# Altium PCB PCB.PcbDoc (part 1 of 2)
Units mm, origin at the board's own origin, x right, y up, seen from the top; angles counter-clockwise.
Board outline 130 x 130 mm, 2 copper layers (Top Layer, Bottom Layer), stack 1.571 mm thick; 113 components, 99 nets, 422 pads, 245 vias.
Unrouted connection lines stored in the file: 122.
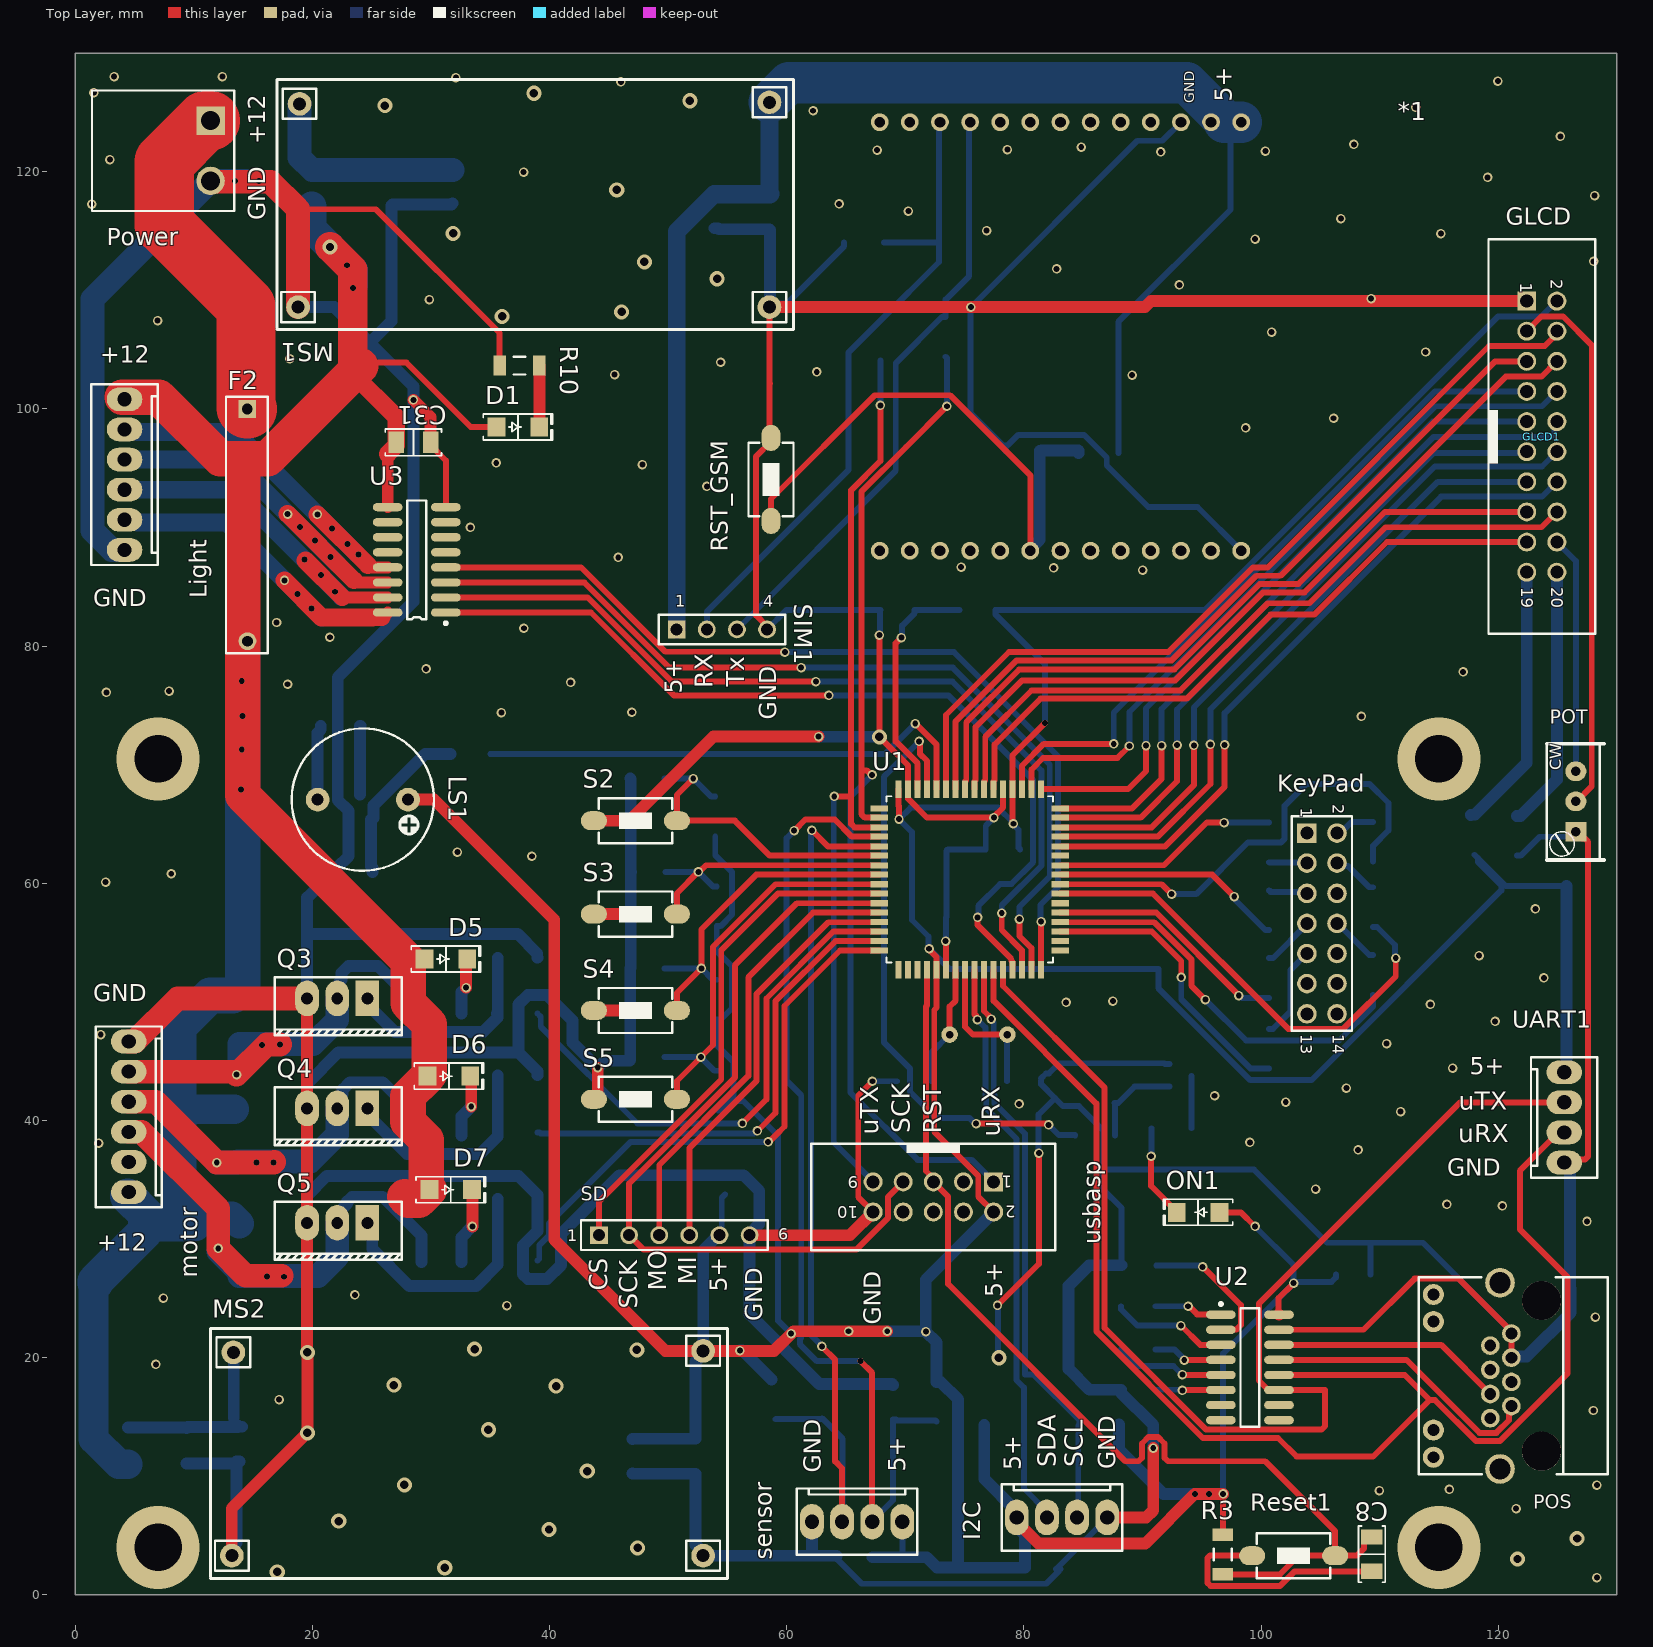
[diagram p0: Top Layer view]
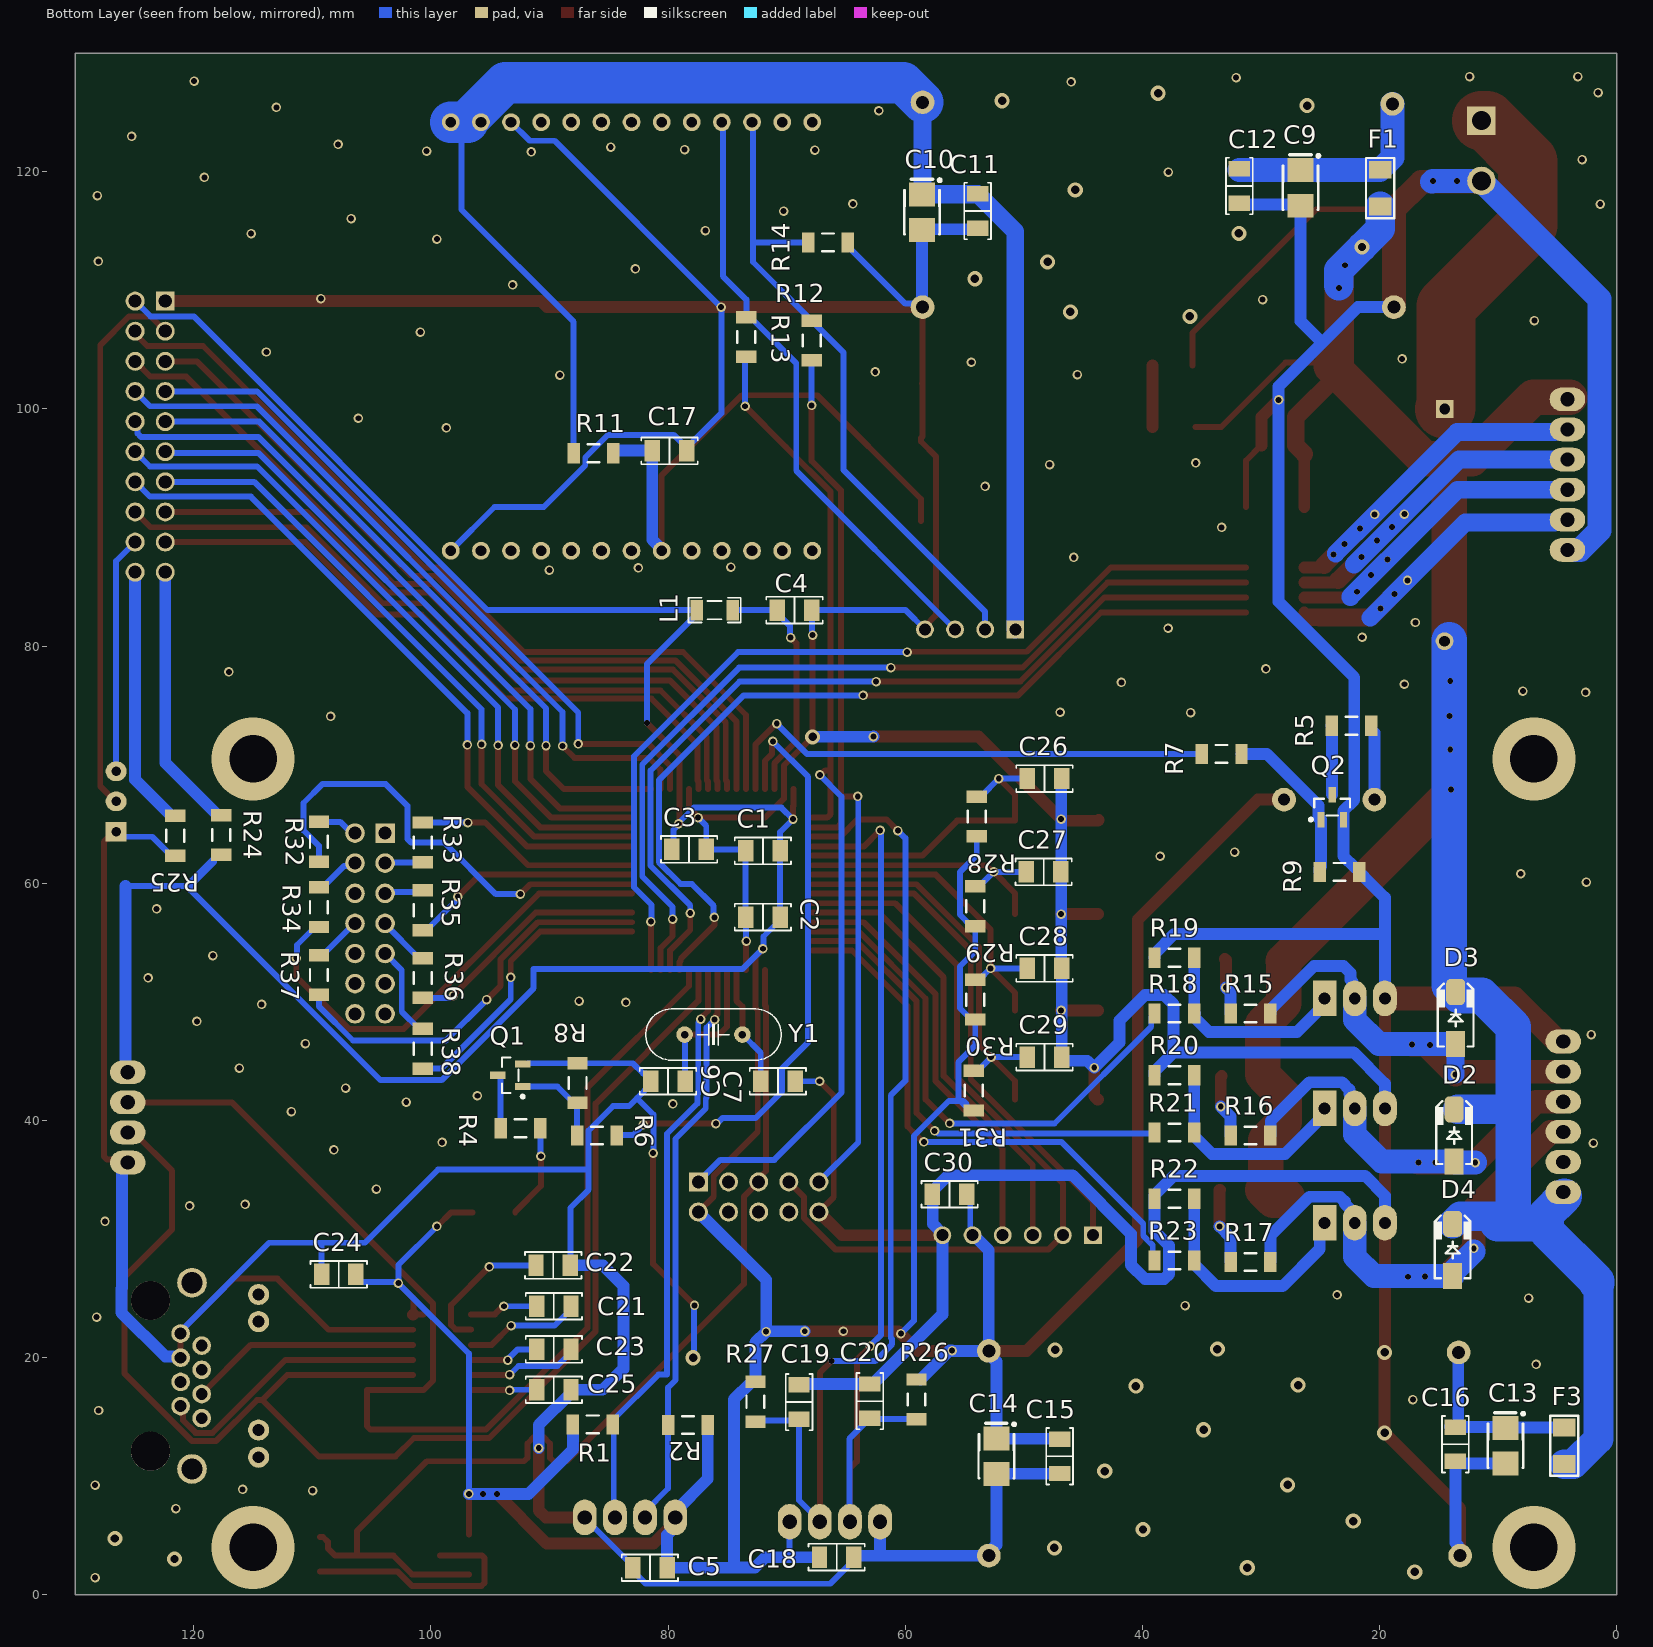
[diagram p1: Bottom Layer view, seen from below]

## Layer stack, top to bottom
Top Solder: solder mask 0.0102, Solder Resist, Dk 3.5
Top Layer: signal copper 0.0356
Dielectric 1: dielectric 1.5, FR-4, Dk 4.8
Bottom Layer: signal copper 0.0356
Bottom Solder: solder mask 0.0102, Solder Resist, Dk 3.5

## Board outline
0,0 130,0 130,130 0,130

## Design rules (kind name [scope] priority, off if disabled: settings)
AcuteAngle [All] p1: minimum=6.00000000000000E+0001 checktracksonly=TRUE
AssemblyTestPointUsage [All] p1 off:
AssemblyTestpoint [All] p1 off: testpointundercomponent=TRUE minsize=1.016 maxsize=2.54 preferedsize=1.524 minholesize=0 maxholesize=1.016 preferedholesize=0.813 testpointgrid=0.025 usegrid=TRUE gridtolerance=0 allowsidetop=TRUE allowsidebottom=TRUE
BoardOutlineClearance [All] p1: gap=0.2 ignorepadtopadclearanceinfootprint=FALSE
Clearance Poly_Clearance [All vs InPolygon] p1: gap=0.25 ignorepadtopadclearanceinfootprint=TRUE except(0.3: Arc-Hole Track-Hole SMDPad-Hole THPad-Hole Via-Hole Fill-Hole Poly-Hole Region-Hole Text-Hole)
Clearance [All] p2: gap=0.2 ignorepadtopadclearanceinfootprint=FALSE except(0.3: Arc-Hole Track-Hole SMDPad-Hole THPad-Hole Via-Hole Fill-Hole Poly-Hole Region-Hole Text-Hole)
FabricationTestPointUsage [All] p1 off: valid=0 allowmultiple=FALSE
FabricationTestpoint [All] p1 off: side=3 testpointundercomponent=TRUE minsize=1.016 maxsize=2.54 preferedsize=1.524 minholesize=0 maxholesize=1.016 preferedholesize=0.813 testpointgrid=0.025 allowsidetop=TRUE allowsidebottom=TRUE usegrid=TRUE gridtolerance=0
HoleSize [All] p1: absolutevalues=TRUE maxlimit=10 minlimit=0.4 maxpercent=80.000 minpercent=20.000
HoleToHoleClearance [All] p1: gap=0.3 allowstackedmicrovias=TRUE
MinimumAnnularRing [All] p1: minimumring=0.15
MinimumSolderMaskSliver [All] p1: minsoldermaskwidth=0.01
PolygonConnect [All] p1: thpad.connectstyle=Relief thpad.reliefconductorwidth=0.4 thpad.reliefentries=4 thpad.polygonreliefangle="90 Angle" thpad.airgapwidth=0.4 smdpad.connectstyle=Relief smdpad.reliefconductorwidth=0.4 smdpad.reliefentries=4 smdpad.polygonreliefangle="90 Angle" smdpad.airgapwidth=0.4 via.connectstyle=Direct via.reliefconductorwidth=0.254 via.reliefentries=4 via.polygonreliefangle="90 Angle" via.airgapwidth=0.254
RoutingVias [All] p1: holewidth=0.4 width=0.7 viastyle="Through Hole" minholewidth=0.4 minwidth=0.7 maxholewidth=3 maxwidth=6
SilkToSilkClearance [All] p1: silktosilkclearance=0
SilkToSolderMaskClearance [IsPad] p1: minsilkscreentomaskgap=0.01 clearancetoexposedcopper=TRUE
SolderMaskExpansion [All] p1: expansion=0.102 istentingtop=FALSE
Width [All] p1: maxlimit=10 minlimit=0.2 preferedwidth=0.3
21 further rules are at their usual default settings.

## Classes and differential pairs
component class U_SDcard: " " C30
component class U_POS: C21 C22 C23 C24 C25 POS U2
component class U_Lighting: C31 Light U3
component class U_GSM: *1 C17 R11 R12 R13 R14 RST_GSM SIM1
component class U_Sensor: C18 C19 C20 R26 R27 sensor
component class U_KeyPad: KeyPad R32 R33 R34 R35 R36 R37 R38
component class U_Motor: D2 D3 D4 D5 D6 D7 motor Q3 Q4 Q5 R15 R16 R17 R18 R19 R20 R21 R22 R23
component class U_Switch: C26 C27 C28 C29 R28 R29 R30 R31 S2 S3 S4 S5
component class U_GLCD: GLCD1 POT R24 R25
component class U_Controller: C1 C2 C3 C4 C5 C6 C7 C8 I2C L1 LS1 ON1 Q1 Q2 R1 R2 R3 R4 R5 R6 R7 R8 R9 Reset1 U1 UART1 usbasp Y1

## Components (designator, comment, footprint, x,y, rotation, side; value= is the part's Value field where it differs from the comment)
*1 "EC200miniDB" PCBComponent_1 98.323,124.181 r180 top
C1 "" "CAP 1206/3216" 72.009,62.738 r0 bottom
C2 "" "CAP 1206/3216" 72.009,57.15 r0 bottom
C3 "100n" "CAP 1206/3216" 78.232,62.865 r180 bottom
C4 "100n" "CAP 1206/3216" 69.342,83.033 r180 bottom
C5 "100n" "CAP 1206/3216" 81.534,2.286 r0 bottom
C6 "22p" "CAP 1206/3216" 80.01,43.307 r0 bottom
C7 "22p" "CAP 1206/3216" 70.739,43.307 r180 bottom
C8 "100n" "CAP 1206/3216" 109.347,3.429 r270 top
C9 "10u" SMT_C_Tantalum_B 26.67,118.642 r270 bottom
C10 "10u" SMT_C_Tantalum_B 58.598,116.586 r270 bottom
C11 "100n" "CAP 1206/3216" 53.899,116.688 r270 bottom
C12 "100n" "CAP 1206/3216" 31.826,118.796 r270 bottom
C13 "10u" SMT_C_Tantalum_B 9.398,12.573 r270 bottom
C14 "10u" SMT_C_Tantalum_B 52.324,11.684 r270 bottom
C15 "100n" "CAP 1206/3216" 46.99,11.684 r270 bottom
C16 "100n" "CAP 1206/3216" 13.614,12.7 r270 bottom
C17 "100n" "CAP 1206/3216" 79.883,96.469 r180 bottom
C18 "100n" "CAP 1206/3216" 65.786,3.175 r180 bottom
C19 "2n" "CAP 1206/3216" 68.961,16.256 r90 bottom
C20 "2n" "CAP 1206/3216" 62.992,16.33 r90 bottom
C21 "1u'F, 50'V" "CAP 1206/3216" 89.637,24.333 r180 bottom
C22 "1u'F, 50'V" "CAP 1206/3216" 89.687,27.788 r180 bottom
C23 "1u'F, 50'V" "CAP 1206/3216" 89.637,20.701 r180 bottom
C24 "1u'F, 50'V" "CAP 1206/3216" 107.772,27.026 r0 bottom
C25 "1u'F, 50'V" "CAP 1206/3216" 89.637,17.297 r180 bottom
C26 "100n" "CAP 1206/3216" 48.26,68.834 r180 bottom
C27 "100n" "CAP 1206/3216" 48.334,60.96 r180 bottom
C28 "100n" "CAP 1206/3216" 48.26,52.832 r180 bottom
C29 "100n" "CAP 1206/3216" 48.26,45.339 r180 bottom
C30 "1u'F, 50'V" "CAP 1206/3216" 56.261,33.782 r180 bottom
C31 "1u'F, 50'V" "CAP 1206/3216" 28.524,97.18 r180 top
D1 "Yellow, 1206" "LED 1206/3216 YELLOW" 37.338,98.476 r0 top
D2 "1N5819" 430X270D 13.716,38.735 r90 bottom
D3 "1N5819" 430X270D 13.589,48.641 r90 bottom
D4 "1N5819" 430X270D 13.843,29.083 r90 bottom
D5 "Yellow, 1206" "LED 1206/3216 YELLOW" 31.267,53.619 r0 top
D6 "Yellow, 1206" "LED 1206/3216 YELLOW" 31.521,43.739 r0 top
D7 "Yellow, 1206" "LED 1206/3216 YELLOW" 31.674,34.163 r0 top
F1 "2A" 1206_F 19.964,118.618 r90 bottom
F2 "180'C, 10'A" PIN-W2/E2.8 14.529,89.611 r270 top
F3 "2A" 1206_F 4.445,12.573 r90 bottom
GLCD1 "10x2" BOX-HDR-10X2-2.54mm-S 123.673,97.663 r270 top
I2C "4'Pin" "MOLEX KK 0022272041" 83.21,6.528 r180 top
KeyPad "7x2" HDR_THT_7x2M_2.54mm 105.131,56.617 r270 top (schematic designator KeyPad1)
L1 "100nH" IND1206 76.073,83.033 r180 bottom
Light "6'Pin" "MOLEX KK 0022272061" 4.166,94.463 r90 top (schematic designator Light1)
LS1 "5V" BZ_SJ 24.257,67.056 r180 top
motor "6'Pin" "MOLEX KK 0022272061" 4.521,40.31 r90 top
MS1 "LM2596" LM2596_modsen 38.481,116.84 r0 top
MS2 "LM2596" LM2596_modsen 32.893,11.557 r0 top
ON1 "Value?" "LED 1206/3216 GREEN" 94.691,32.258 r180 top
POS "RJ45, mini" RJ45_MINI 123.647,18.466 r90 top (schematic designator J1)
POT "10K" "Multi turn 01" 126.543,64.364 r180 top (schematic designator P1)
Power "2'Pin" Phoenix_2PIN_RA_P5.08mm 7.417,121.768 r270 top (schematic designator Power1)
Q1 "NPN" SOT23_N 93.311,43.815 r0 bottom
Q2 "NPN" SOT23_N 24.003,66.421 r90 bottom
Q3 "NPN" "TO-220 AB" 22.098,50.292 r180 top
Q4 "NPN" "TO-220 AB" 22.098,41.021 r180 top
Q5 "NPN" "TO-220 AB" 22.098,31.369 r180 top
R1 "Value?" "RES 1206 (3216X08L)" 85.061,14.376 r0 bottom value=4.7K
R2 "Value?" "RES 1206 (3216X08L)" 79.629,14.326 r180 bottom value=4.7K
R3 "4.7K" "RES 1206 (3216X08L)" 96.774,2.107 r90 top value=10K
R4 "47K" "RES 1206 (3216X08L)" 93.751,39.345 r180 bottom value=Value?
R5 "Value?" "RES 1206 (3216X08L)" 21.082,73.279 r0 bottom
R6 "Value?" "RES 1206 (3216X08L)" 87.301,38.735 r180 bottom value=4.7K
R7 "4.7K" "RES 1206 (3216X08L)" 32.029,70.917 r0 bottom
R8 "4.7K" "RES 1206 (3216X08L)" 87.63,44.45 r270 bottom value=47K
R9 "47K" "RES 1206 (3216X08L)" 22.098,60.96 r0 bottom
R10 "1.8K" "RES 1206 (3216X08L)" 36.17,103.657 r0 top
R11 "10K" "RES 1206 (3216X08L)" 84.987,96.266 r0 bottom
R12 "47K" "RES 1206 (3216X08L)" 67.894,104.469 r90 bottom
R13 "1K" "RES 1206 (3216X08L)" 73.406,104.775 r90 bottom value=1.2K
R14 "5.6K" "RES 1206 (3216X08L)" 65.226,114.046 r0 bottom
R15 "1.8K" "RES 1206 (3216X08L)" 29.591,49.022 r0 bottom
R16 "1.8K" "RES 1206 (3216X08L)" 29.591,38.735 r0 bottom
R17 "1.8K" "RES 1206 (3216X08L)" 29.591,28.067 r0 bottom
R18 "4.7K" "RES 1206 (3216X08L)" 36.012,49.022 r0 bottom
R19 "47K" "RES 1206 (3216X08L)" 38.608,53.721 r180 bottom
R20 "47K" "RES 1206 (3216X08L)" 38.608,43.815 r180 bottom
R21 "4.7K" "RES 1206 (3216X08L)" 36.012,38.989 r0 bottom
R22 "47K" "RES 1206 (3216X08L)" 38.608,33.401 r180 bottom
R23 "4.7K" "RES 1206 (3216X08L)" 36.012,28.194 r0 bottom
R24 "0" "RES 1206 (3216X08L)" 117.678,65.38 r270 bottom
R25 "0" "RES 1206 (3216X08L)" 121.564,65.303 r270 bottom
R26 "10K" "RES 1206 (3216X08L)" 59.055,17.78 r270 bottom
R27 "10K" "RES 1206 (3216X08L)" 72.644,14.986 r90 bottom
R28 "10K" "RES 1206 (3216X08L)" 53.975,66.929 r270 bottom
R29 "10K" "RES 1206 (3216X08L)" 54.102,59.361 r270 bottom
R30 "10K" "RES 1206 (3216X08L)" 54.102,51.487 r270 bottom
R31 "10K" "RES 1206 (3216X08L)" 54.229,43.815 r270 bottom
R32 "100" "RES 1206 (3216X08L)" 109.449,62.205 r90 bottom
R33 "100" "RES 1206 (3216X08L)" 100.686,62.153 r90 bottom
R34 "Value" "RES 1206 (3216X08L)" 109.449,56.692 r90 bottom
R35 "Value" "RES 1206 (3216X08L)" 100.686,59.03 r270 bottom
R36 "Value" "RES 1206 (3216X08L)" 100.686,53.315 r270 bottom
R37 "Value" "RES 1206 (3216X08L)" 109.449,50.977 r90 bottom
R38 "Value" "RES 1206 (3216X08L)" 100.686,47.346 r270 bottom
Reset1 "PB" SW_PB_SMD_2PIN_SPST_6X3X2 102.743,3.302 r0 top
RST_GSM "PB" SW_PB_SMD_2PIN_SPST_6X3X2 58.674,94.056 r90 top (schematic designator S1)
S2 "PB" SW_PB_SMD_2PIN_SPST_6X3X2 47.244,65.278 r0 top
S3 "PB" SW_PB_SMD_2PIN_SPST_6X3X2 47.244,57.404 r0 top
S4 "PB" SW_PB_SMD_2PIN_SPST_6X3X2 47.244,49.276 r0 top
S5 "PB" SW_PB_SMD_2PIN_SPST_6X3X2 47.244,41.783 r0 top
SD "6" HDR_THT_6F_2.54mm 50.521,30.328 r0 top (schematic designator SD1)
sensor "4'Pin" "MOLEX KK 0022272041" 65.938,6.172 r180 top
SIM1 "4" HDR_THT_4F_2.54mm 54.534,81.407 r0 top
U1 "ATMEGA64A-AU" QFP80P1600X1600X120-64N 75.438,60.325 r0 top
U2 "MAX3232" NSO16_M 99.06,19.177 r0 top
U3 "ULN2003" SO16_M 28.804,87.274 r180 top
UART1 "UART" "MOLEX KK 0022272041" 125.56,40.259 r270 top
usbasp "5x2" BOX-HDR-5X2-2.54mm-S 72.365,33.553 r180 top (schematic designator usbasp1)
Y1 "8M" "XTAL Small" 76.173,47.244 r0 bottom

## Footprints (in the part's own frame and the unit in brackets; to place one, negate y for a bottom-side part, rotate by r counter-clockwise, add the part's x,y. Pads: shape width x height; smd on the part's side, far side on the other; paste and mask are expansions set on the pad)
430X270D [mm] "SMA Molded Diode, 2-Leads, Body 4.3x2.7mm"
  rect 2.2x1.6 smd: 1(-2.2,0)
  rrect50% 2.2x1.6 smd: 2(2.2,0)
  silkscreen extent -2.4,-1.5 2.9,1.5, body extent -2.75,-1.4 2.75,1.4, height 2.6
1206_F [mm] "Surface mount FUSE 1206"
  rect 1.5x1.9 smd: 1(-1.55,0) 2(1.55,0)
  silkscreen extent -2.54,-1.18 2.54,1.18, body extent -1.6,-0.83 1.6,0.83, height 0.56
BOX-HDR-5X2-2.54mm-S [mm] "10 pins, straight, gold plating"
  rect 1.6x1.6 hole 1.1: 1(-5.08,-1.27)
  round 1.6 hole 1.1: 2(-5.08,1.27) 3(-2.54,-1.27) 4(-2.54,1.27) 5(0,-1.27) 6(0,1.27) 7(2.54,-1.27) 8(2.54,1.27) 9(5.08,-1.27) 10(5.08,1.27)
  silkscreen extent -10.28,-4.5 10.28,4.5, body extent -10.18,-4.42 10.18,4.75, height 9.13
BOX-HDR-10X2-2.54mm-S [mm] "20 pins, straight, gold plating"
  rect 1.6x1.6 hole 1.1: 1(-11.43,-1.27)
  round 1.6 hole 1.1: 2(-11.43,1.27) 3(-8.89,-1.27) 4(-8.89,1.27) 5(-6.35,-1.27) 6(-6.35,1.27) 7(-3.81,-1.27) 8(-3.81,1.27) 9(-1.27,-1.27) 10(-1.27,1.27) 11(1.27,-1.27) 12(1.27,1.27) 13(3.81,-1.27) 14(3.81,1.27) 15(6.35,-1.27) 16(6.35,1.27) 17(8.89,-1.27) 18(8.89,1.27) 19(11.43,-1.27) 20(11.43,1.27)
  silkscreen extent -16.63,-4.5 16.63,4.5, body extent -16.53,-4.42 16.53,4.75, height 9.13
BZ_SJ [mm] "Buzzer From Old SJ Library"
  round 2 hole 1: 1(-3.81,0) 2(3.81,0)
  silkscreen extent -6,-6 6,6, body extent -5.82,-6 6.17,5.99, height 9.5
"CAP 1206/3216" [mm] "Chip Capacitor, 2-Leads, Body 3.25x1.60mm, IPC Medium Density"
  rect 1.3x1.8 smd: 1(-1.45,0) 2(1.45,0)
  silkscreen extent -2.37,-1.12 2.37,1.12, body extent -1.6,-0.81 1.6,0.81, height 1.62
HDR_THT_4F_2.54mm [mm] "Socket Header, Pitch 2.54 mm, THT, Vertical, single row, 4p"
  rect 1.5x1.5 hole 1.02: 1(-3.81,0)
  round 1.5 hole 1.02: 2(-1.27,0) 3(1.27,0) 4(3.81,0)
  silkscreen extent -5.33,-1.25 5.33,1.25, body extent -5.33,-1.25 5.33,1.25, height 8.55
HDR_THT_6F_2.54mm [mm] "Socket Header, Pitch 2.54 mm, THT, Vertical, single row, 6p"
  rect 1.5x1.5 hole 1.02: 1(-6.35,0)
  round 1.5 hole 1.02: 2(-3.81,0) 3(-1.27,0) 4(1.27,0) 5(3.81,0) 6(6.35,0)
  silkscreen extent -7.87,-1.25 7.87,1.25, body extent -7.87,-1.25 7.87,1.25, height 8.55
HDR_THT_7x2M_2.54mm [mm] "Pin Header, pitch 2.54 mm, THT, Vertical, dual row, 14p"
  rect 1.65x1.65 hole 1.1: 1(-7.62,-1.27)
  round 1.65 hole 1.1: 2(-7.62,1.27) 3(-5.08,-1.27) 4(-5.08,1.27) 5(-2.54,-1.27) 6(-2.54,1.27) 7(0,-1.27) 8(0,1.27) 9(2.54,-1.27) 10(2.54,1.27) 11(5.08,-1.27) 12(5.08,1.27) 13(7.62,-1.27) 14(7.62,1.27)
  silkscreen extent -9.04,-2.54 9.04,2.54, body extent -8.89,-2.54 8.89,2.54, height 8.59
IND1206 [mm] "Chip Inductor, 2-Leads, Body 3/20x1/60mm, IPC Medium Density DESIGNER:ABBAS BASEREH"
  rect 1.04x1.74 smd: 1(-1.51,0) 2(1.51,0)
  silkscreen extent -2.2,-1.05 2.2,1.05, body extent -1.65,-0.85 1.65,0.85, height 0.94
"LED 1206/3216 GREEN" [mm] "Chip Diode, 2-Leads, Body 3.13x1.55mm, IPC Medium Density"
  rect 1.5x1.6 smd: 1(-1.8,0) 2(1.8,0)
  silkscreen extent -2.92,-1.1 2.92,1.1, body extent -1.6,-0.8 1.6,0.8, height 0.9
"LED 1206/3216 YELLOW" [mm] "Chip Diode, 2-Leads, Body 3.13x1.55mm, IPC Medium Density"
  rect 1.5x1.6 smd: 1(-1.8,0) 2(1.8,0)
  silkscreen extent -2.92,-1.1 2.92,1.1, body extent -1.6,-0.8 1.6,0.8, height 0.9
LM2596_modsen [mm]
  round 2 hole 1.1: 1(-19.558,8.89) 2(-19.685,-8.255) 3(20.066,-8.255) 4(20.066,9.017)
  silkscreen extent -21.46,-10.16 22.1,10.92, body extent -21.5,-10.12 22,10.88, height 16.91
"MOLEX KK 0022272041" [mm]
  oval 2x3 hole 1.2: 1(-3.81,0) 2(-1.27,0) 3(1.27,0) 4(3.81,0)
  silkscreen extent -5.08,-2.79 5.08,2.79, body extent -5.08,-2.9 5.08,2.9, height 11.7
"MOLEX KK 0022272061" [mm]
  oval 2x3 hole 1.2: 1(-6.35,0) 2(-3.81,0) 3(-1.27,0) 4(1.27,0) 5(3.81,0) 6(6.35,0)
  silkscreen extent -7.62,-2.79 7.62,2.79, body extent -7.62,-2.9 7.62,2.9, height 11.7
"Multi turn 01" [mil] "Stand Multi Turn - Turning CW Increase P1~2 Resistor"
  rect 70x65 hole 31.5: 1(0,0)
  oval 70x65 hole 31.5: 2(0,-100) 3(0,-200)
  silkscreen extent -94,-291 96,94, body extent -74,-282 92,92, height 452
NSO16_M [mm]
  oval 2.5x0.7 smd: 1(-2.45,4.445) 2(-2.45,3.175) 3(-2.45,1.905) 4(-2.45,0.635) 5(-2.45,-0.635) 6(-2.45,-1.905) 7(-2.45,-3.175) 8(-2.45,-4.445) 9(2.45,-4.445) 10(2.45,-3.175) 11(2.45,-1.905) 12(2.45,-0.635) 13(2.45,0.635) 14(2.45,1.905) 15(2.45,3.175) 16(2.45,4.445)
  silkscreen extent -2.57,-5 0.8,5.47, body extent -3.1,-5.08 3.1,5.08, height 1.73
PCBComponent_1 [mm]
  round 1.5 hole 0.9: 1(0,0) 2(2.54,0) 3(5.08,0) 4(7.62,0) 5(10.16,0) 6(12.7,0) 7(15.24,0) 8(17.78,0) 9(20.32,0) 10(22.86,0) 11(25.4,0) 12(27.94,0) 13(30.48,0) 14(30.48,36.14) 15(27.94,36.14) 16(25.4,36.14) 17(22.86,36.14) 18(20.32,36.14) 19(17.78,36.14) 20(15.24,36.14) 21(12.7,36.14) 22(10.16,36.14) 23(7.62,36.14) 24(5.08,36.14) 25(2.54,36.14) 26(0,36.14)
  body extent -11.45,-2.06 32.75,38.2, height 2.36
Phoenix_2PIN_RA_P5.08mm [mm] "Phoenix 2 Pin; Pitch 5.08mm; Body 1016X1200"
  rect 2.4x2.4 hole 1.6: 1(-2.54,4)
  round 2.4 hole 1.6: 2(2.54,4)
  silkscreen extent -5.08,-6 5.08,6, body extent -5.08,-6 5.08,6, height 8.55
PIN-W2/E2.8 [mm] "Thru-Hole; 2 Leads"
  rect 1.5x1.5 hole 0.9: 1(-10.389,-0.025)
  round 1.5 hole 0.9: 2(9.195,0)
  silkscreen extent -11.4,-1.8 10.21,1.73, body extent -11.24,-1.7 10.08,1.6, height 2.57
QFP80P1600X1600X120-64N [mil]
  rect 58x20 smd: 1(-300,236) 2(-300,205) 3(-300,173) 4(-300,142) 5(-300,110) 6(-300,79) 7(-300,47) 8(-300,16) 9(-300,-16) 10(-300,-47) 11(-300,-79) 12(-300,-110) 13(-300,-142) 14(-300,-173) 15(-300,-205) 16(-300,-236) 33(300,-236) 34(300,-205) 35(300,-173) 36(300,-142) 37(300,-110) 38(300,-79) 39(300,-47) 40(300,-16) 41(300,16) 42(300,47) 43(300,79) 44(300,110) 45(300,142) 46(300,173) 47(300,205) 48(300,236)
  rect 20x58 smd: 17(-236,-300) 18(-205,-300) 19(-173,-300) 20(-142,-300) 21(-110,-300) 22(-79,-300) 23(-47,-300) 24(-16,-300) 25(16,-300) 26(47,-300) 27(79,-300) 28(110,-300) 29(142,-300) 30(173,-300) 31(205,-300) 32(236,-300) 49(236,300) 50(205,300) 51(173,300) 52(142,300) 53(110,300) 54(79,300) 55(47,300) 56(16,300) 57(-16,300) 58(-47,300) 59(-79,300) 60(-110,300) 61(-142,300) 62(-173,300) 63(-205,300) 64(-236,300)
  silkscreen extent -276,-276 276,276, body extent -315,-315 315,315, height 47
"RES 1206 (3216X08L)" [mm]
  rect 1.05x1.7 smd: 1(-0.377,0) 2(2.973,0)
  silkscreen extent 0.8,-0.75 1.8,0.75, body extent -0.23,-0.76 2.82,0.76, height 0.6
RJ45_MINI [mm] "RJ45 MiniWith LED"
  round 1.575 hole 1: 1(3.57,2.54) 2(2.55,4.32) 3(1.53,2.54) 4(0.51,4.32) 5(-0.51,2.54) 6(-1.53,4.32) 7(-2.55,2.54) 8(-3.57,4.32)
  round 2.5 hole 1.8: 9(-7.85,3.5) 10(7.85,3.5)
  round 3.3 hole 3.3 unplated: 11(-6.35,0) 12(6.35,0)
  round 1.778 hole 1: 13(6.86,9.12) 14(4.57,9.12) 15(-4.57,9.12) 16(-6.86,9.12)
  silkscreen extent -8.3,-5.59 8.3,10.34, body extent -8.35,-5.99 8.36,10.26, height 14.75
SMT_C_Tantalum_B [mm] "Capacitor, SM Tantalum; Body 3.5 x 2.8 mm (LxW typ)"
  rect 2x2.2 smd: 1(-1.5,0) 2(1.5,0)
  silkscreen extent -2.82,-1.5 1.85,1.62, body extent -1.75,-1.4 1.75,1.4, height 1.9
SO16_M [mm]
  oval 2.5x0.7 smd: 1(-2.45,4.445) 2(-2.45,3.175) 3(-2.45,1.905) 4(-2.45,0.635) 5(-2.45,-0.635) 6(-2.45,-1.905) 7(-2.45,-3.175) 8(-2.45,-4.445) 9(2.45,-4.445) 10(2.45,-3.175) 11(2.45,-1.905) 12(2.45,-0.635) 13(2.45,0.635) 14(2.45,1.905) 15(2.45,3.175) 16(2.45,4.445)
  silkscreen extent -2.58,-5 0.8,5.47, body extent -3,-4.97 3,4.96, height 1.62
SOT23_N [mm] "SOT23, 3-Leads, Body 2.9x1.3mm, Pitch 0.95mm, Lead Span 2.3mm, IPC Medium Density"
  rect 1.3x0.6 smd: 1(-1.05,0.95) 2(-1.05,-0.95) 3(1.05,0)
  silkscreen extent -1.17,-1.5 0.7,1.92, body extent -1.27,-1.5 1.27,1.5, height 1.1
SW_PB_SMD_2PIN_SPST_6X3X2 [mm] "SWITCH, PUSHBUTTON, SMD, SPST, 6X3.5X2.5mm, RS-282G05A3, SKQYPA, 50000 Cycles"
  oval 2.2x1.6 smd mask+0.1: 1(-3.5,0) 2(3.5,0)
  silkscreen extent -3.1,-1.9 3.1,1.9, body extent -3.4,-1.86 3.4,1.86, height 2.5
"TO-220 AB" [mm] "TO-220AB, Thru-Hole, Vertical, Heatsink Mounted; 3 In-Line Leads; Pitch 2.54 mm"
  rect 2x3 hole 1: 1(-2.54,0)
  oval 2x3 hole 1: 2(0,0) 3(2.54,0)
  silkscreen extent -5.44,-1.78 5.26,3.12, body extent -5.37,-1.66 5.28,3.14, height 19.5
"XTAL Small" [mil]
  round 55 hole 25: 1(-96.06,0) 2(96.06,0)
  silkscreen extent -225,-85 225,85, body extent -226,-89 226,89, height 140

## Part data
*1: "EICUT.com"
C1 C2 C3 C4 C5 C6 C7 C8 C11 C12 C15 C16 C17 C18 C19 C20 C26 C27 C28 C29: library part Cap_Multi_SMD_100nF_1206, "Bipolar ceramic capacitor SMD", Package=1206, Rating=50V, Inflow=inflow?, Type=MultiLayer, Validation=Valid
C9 C13: library part Cap_Tantalum, "Tantalum Capacitor,TAJ Series-SMD", Package=Package?, Rating=25v, Inflow=inflow?, Type=Tantalum, Validation=Valid
C10 C14: library part Cap_Tantalum, "Tantalum Capacitor,TAJ Series-SMD", Package=Package?, Rating=6.3v, Inflow=inflow?, Type=Tantalum, Validation=Valid
C21 C22 C23 C24 C25 C30 C31: library part Cap_Multi_1u_50_1206, "Bipolar ceramic capacitor SMD", Package=Package?, Rating=Rating?, Inflow=5237, Type=Type?, Validation=Valid
D1 D5 D6 D7: library part Semi_LED_Yellow_1206, "LED", Package=Package?, Rating=Rating?, Inflow=5250, Type=Type?, Validation=Valid
D2 D3 D4: library part Semi_Diod_Sch_1N5819_SMD, "Schottky Rectifiers", Package=SMA, Rating=Rating?, Inflow=inflow?, Type=Schottky, Validation=Valid
F1 F3: library part Other_Elec_Fuse_SMD, "Short circiut  protection", Package=1206, Rating=Rating?, Inflow=inflow?, Type=Fast, Validation=Valid
F2: library part Other_Elec_Fuse_Thermal, "Thermal Fuse", Package=Package?, Rating=Rating?, Inflow=8222, Type=Type?, Validation=NT
GLCD1: library part Con_IDC_10x2, "Male Box Header, 20 pins", Package=Package?, Rating=Rating?, Inflow=7134, Type=Type?, Validation=NT
I2C sensor: library part Con_Signal_4, "Signal Connector 4'Pin", Package=Package?, Rating=Rating?, Inflow=inflow?, Type=Type?, Validation=Valid
KeyPad: library part Con_MPH_7x2_V_THT_2.54, "Header, dual row, 14 pin", Package=Package?, Rating=Rating?, Inflow=7152, Type=Type?, Validation=NT
L1: library part Ind_SMD_1206, "Inductor", Package=1206, Rating=Rating?, Inflow=inflow?, Type=SMD, Validation=Valid
Light motor: library part Con_Signal_6, "Signal Connector 6'Pin", Package=Package?, Rating=Rating?, Inflow=inflow?, Type=Type?, Validation=Valid
LS1: library part Other_Elec_Buzzer, "Magnetic Transducer Buzzer", Package=Dip, Rating=12mm, Inflow=2212, Type=Buzzer, Validation=Valid
MS1 MS2: library part ModSen_LM2596, "DC to DC Buck converter 1.23V-30V 3A", Package=Package?, Rating=Rating?, Inflow=5325, Type=Type?, Validation=Valid
ON1: library part Semi_LED_SMD, "LED", Package=Package?, Rating=Rating?, Inflow=inflow?, Type=LED, Validation=Valid
POS: library part Con_PC_RJ45_MINI, "RJ45 Mini With two LEDs", Package=Package?, Rating=Rating?, Inflow=inflow?, Type=Type?, Validation=NT
POT: library part Res_Multi, "Multi Turn", Package=Package?, Rating=Rating?, Inflow=inflow?, Type=Type?, Validation=Valid
Power: library part Con_Power_2, "Power Connector 2'Pin", Package=Package?, Rating=Rating?, Inflow=inflow?, Type=Type?, Validation=NT
Q1 Q2: library part Semi_BJT_BC817, "NPN General purpose Transistor", Package=Package?, Rating=Rating?, Inflow=inflow?, Type=Type?, Validation=Valid
Q3 Q4 Q5: library part Semi_BJT_TIP41C, "NPN Power transistor", Package=Package?, Rating=Rating?, Inflow=4206, Type=Type?, Validation=NT
R1 R2: library part Res_SMD_0805, "Resistor", Package=0805, Rating=0.125W, Inflow=inflow?, Type=10%, Validation=Valid
R3 R4 R5 R6 R7 R8 R9 R10 R11 R12 R13 R14 R15 R16 R17 R18 R19 R20 R21 R22 R23 R24 R25 R26 R27 R28 R29 R30 R31 R32 R33 R34 R35 R36 R37 R38: library part Res_SMD_1206, "Resistor", Package=1206, Rating=0.25W, Inflow=inflow?, Type=10%, Validation=Valid
Reset1 RST_GSM S2 S3 S4 S5: library part SW_PushButton_2_SMD, "SMT Tactile ‎Switch", Package=SMD, Rating=2b, Inflow=8260, Type=Vertical, Validation=Valid
SD: library part Con_FPH_6x1_V_THT_2.54, "Header, single row, 6 pin", Package=Package?, Rating=Rating?, Inflow=8101, Type=Type?, Validation=NT
SIM1: library part Con_FPH_4x1_V_THT_2.54, "Header, single row, 4 pin", Package=Package?, Rating=Rating?, Inflow=8101, Type=Type?, Validation=NT
U1: "AVR AVRÂ® ATmega Microcontroller IC 8-Bit 16MHz 64KB (32K x 16) FLASH 64-TQFP (14x14)", Package="TQFP-64 Microchip", Check_prices=https://www.snapeda.com/parts/ATMEGA64A-AU/Microchip/view-part/?ref=eda, MF=Microchip, MP=ATMEGA64A-AU, SnapEDA_Link=https://www.snapeda.com/parts/ATMEGA64A-AU/Microchip/view-part/?ref=snap
U2: library part IC_Converter_MAX3232CSE, "RS-232 Interface IC 3.0V to 5.5V, Low-Power, up to 1Mbps, True RS-232 Transceivers Using Four 0.1uF External Capacitors", Package=SOIC-16, Rating=Rating?, Inflow=inflow?, Type=RS232, Validation=Valid
U3: library part IC_Driver_ULN2003, "Seven darlington array drivers", Package=SO-16, Rating=Rating?, Inflow=1506, Type=Driver, Validation=Valid
UART1: library part Con_UART, "UART Connector", Package=Package?, Rating=Rating?, Inflow=4528, Type=Type?, Validation=Valid
usbasp: library part Con_IDC_5x2, "Male Box Header, 10 pins", Package=Package?, Rating=Rating?, Inflow=7119, Type=Type?, Validation=NT
Y1: library part Other_Elec_Xtal_THT, "Crystal Oscillator", Package=Dip, Rating=Rating?, Inflow=inflow?, Type=Quartz, Validation=Valid

## Via types
v1: diameter 0.8, hole 0.5, Top Layer to Bottom Layer, 184 vias
v2: diameter 0.5, hole 0.5, Top Layer to Bottom Layer, 29 vias
v3: diameter 1.27, hole 0.711, Top Layer to Bottom Layer, 28 vias
v4: diameter 7, hole 4, Top Layer to Bottom Layer, 4 vias

## Nets (pads, with @x,y where several pads share a name; then routed paths per layer and width w, separated by ;. In a path a pad name is that pad's centre, name@x,y a point inside that pad or via, vN(x,y) a via of type N, cw(c..) or ccw(c..) an arc to the next point about the centre after c; other vN are vias at no path point)
+5_GSM: *1.1 *1.2 C10.1 C11.1 MS1.4 R11.2 SIM1.1 | length 129.2
  Bottom Layer w0.5: R11.2@87.96,96.266 87.96,107.341 97.434,116.815 97.434,122.53 *1.2@95.783,124.181
  Bottom Layer w1.5: SIM1.1@50.724,81.407 50.724,114.956 53.854,118.086 C10.1@58.547,118.086 ; C11.1@53.899,118.138 53.925,118.112 C10.1@58.547,118.112 ; MS1.4@58.547,125.857 C10.1@58.547,118.112 ; C10.1@58.649,118.138 C10.1@58.624,118.112 ; C10.1@58.547,118.086 C10.1@58.547,118.112 ; C10.1@58.547,118.086 C10.1@58.598,118.086 C10.1@58.624,118.112 ; C10.1@58.547,118.112 C10.1@58.624,118.112
  Bottom Layer w3.5: MS1.4@58.547,125.857 60.186,127.496 93.747,127.496 96.647,124.595 ; 96.876,124.181 *1.1@98.323,124.181
+5_IC: C1.1 C2.1 C3.1 C5.1 C14.1 C15.1 C18.1 C24.1 C30.2 GLCD1.2 I2C.4 L1.1 LS1.1 MS2.4 ON1.1 R1.2 R2.2 R3.2 R24.2 R26.1 R27.2 R28.2 R29.2 R30.2 R31.2 SD.5 sensor.1 U1.21 U1.52 U1.64 U2.16 UART1.1 usbasp.2 | length 521.1
  Top Layer w0.5: U1.64@69.444,67.945 69.444,66.523 69.465,66.501 69.465,65.544 69.469,65.54 v1(69.469,65.405) ; v1(72.009,54.483) 72.009,54.402 72.64,53.771 72.64,52.709 U1.21@72.644,52.705 72.644,49.523 72.441,49.32 72.441,39.055 76.155,35.341 76.155,33.573 usbasp.2@77.445,32.283 ; v1(79.121,65.024) 79.121,65.105 79.045,65.181 U1.52@79.045,67.945 79.045,70.79 v2(81.763,73.508) ; ON1.1@96.491,32.258 98.298,32.258 v1(99.492,31.064) ; R3.2@96.774,5.08 96.799,5.105 v1(96.799,8.509) ; U2.16@100.61,23.622 U2.16@101.51,23.622 ; U2.16@101.473,23.659 101.473,25.019 v1(102.743,26.289)
  Top Layer w1: LS1.1@28.067,67.056 30.277,67.056 40.394,56.938 40.394,29.938 49.759,20.574 MS2.4@52.959,20.574 56.058,20.574 58.928,20.574 v1(60.376,22.022) 60.579,22.225 v1(65.227,22.225) v1(68.478,22.225) ; I2C.4@79.4,6.528 79.4,6.163 81.236,4.328 90.231,4.328 v2(94.412,8.509) v1(96.799,8.509) ; U2.16@101.473,23.659 U2.16@101.51,23.622
  Bottom Layer w0.5: R28.2@53.975,63.956 53.975,62.367 55.402,60.94 55.402,57.363 54.427,56.388 R29.2@54.102,56.388 54.102,54.283 55.402,52.983 55.402,49.489 54.427,48.514 R30.2@54.102,48.514 54.102,46.33 55.529,44.903 55.529,41.817 55.368,41.656 ; R31.2@54.229,40.842 54.554,40.842 R31.2@54.716,41.005 ; SD.5@54.331,30.328 54.522,30.519 54.522,33.493 C30.2@54.811,33.782 ; R31.2@54.391,41.005 R31.2@54.716,41.005 ; v1(60.376,22.022) 59.284,23.114 59.284,38.692 56.32,41.656 55.368,41.656 ; sensor.1@69.748,6.172 69.748,3.2 69.774,3.175 ; C3.1@79.682,62.865 79.549,62.998 79.549,64.515 79.121,64.943 v1(79.121,65.024) 79.121,65.083 77.822,66.382 70.446,66.382 v1(69.469,65.405) 70.559,64.315 C1.1@70.559,62.738 C2.1@70.559,57.15 70.559,56.9 71.952,55.507 71.952,54.54 v1(72.009,54.483) 73.736,52.756 91.338,52.756 91.338,51.156 99.097,43.398 104.258,43.398 120.265,59.405 120.265,59.819 118.278,61.807 R24.2@118.278,62.132 ; v2(81.763,73.508) 81.763,78.503 77.583,82.683 L1.1@77.583,83.033 95.225,83.033 119.996,107.803 123.653,107.803 GLCD1.2@124.943,109.093 ; v1(96.799,8.509) 96.799,20.345 v1(102.743,26.289) ; v1(99.492,31.064) 102.743,27.813 v1(102.743,26.289) ; C24.1@106.322,27.026 106.322,26.776 105.922,26.376 102.911,26.376 102.824,26.289 v1(102.743,26.289) ; R24.2@118.003,62.407 R24.2@118.278,62.132 ; 125.751,59.759 120.651,59.759 R24.2@118.278,62.132 ; R31.2@54.716,41.005 R31.2@54.829,41.117 ; R31.2@54.829,41.117 55.368,41.656 ; R31.2@54.829,41.117 54.829,41.363 55.122,41.656 55.368,41.656
  Bottom Layer w1: C15.1@46.99,13.134 47.015,13.159 52.299,13.159 C14.1@52.324,13.184 52.324,19.668 52.959,20.303 MS2.4@52.959,20.574 ; SD.5@54.331,30.328 54.229,30.328 52.959,29.058 MS2.4@52.959,20.574 ; v1@56.058,20.574 MS2.4@52.959,20.574 ; v1(56.058,20.599) 56.288,20.599 R26.1@58.73,18.157 ; C18.1@67.236,3.175 69.774,3.175 71.804,3.175 72.668,2.311 74.422,2.311 74.447,2.286 ; v1(68.478,22.225) 71.704,22.225 v1(71.73,22.2) ; R2.2@76.656,14.326 76.656,9.772 79.4,7.028 I2C.4@79.4,6.528 79.4,5.757 80.084,5.074 C5.1@80.084,2.286 74.447,2.286 ; usbasp.2@77.445,32.283 71.73,26.568 v1(71.73,22.2) ; R1.2@88.034,14.376 88.034,12.246 91.77,8.509 v1(96.799,8.509) ; GLCD1.2@124.943,109.093 GLCD1.2@124.943,109.143 ; UART1.1@125.56,44.069 125.751,44.26 125.751,59.759 ; v1(71.73,22.2) 72.644,21.285 R27.2@72.644,17.959 72.669,17.934 72.994,17.934 74.447,16.481 74.447,2.286
  other v2: 95.606,8.509
+12: C31.2 D1.1 D2.2 D3.2 D4.2 D5.1 D6.1 D7.1 F1.1 F2.2 F3.1 Light.6 motor.1 U3.9 | length 238.6
  Top Layer w0.5: 23.419,103.911 27.922,103.911 33.358,98.476 D1.1@35.538,98.476 ; C31.2@27.074,96.93 C31.2@27.074,97.18
  Top Layer w1: U3.9@26.354,91.719 26.354,96.21
  Top Layer w1.5: 23.419,103.911 23.419,102.976 27.074,99.32 C31.2@27.074,97.18 ; 26.354,96.21 C31.2@27.074,96.93
  Top Layer w2.5: Light.6@3.988,100.99 Light.6@4.166,100.813 ; v3(21.488,113.656) 23.419,111.725 23.419,103.911
  Top Layer w3: Light.6@3.988,100.99 7.061,100.99 12.252,95.8 14.247,95.8 ; 24.065,103.622 23.419,102.976 16.243,95.8 14.247,95.8 ; 27.788,33.579 28.092,33.274 28.985,33.274 D7.1@29.874,34.163 ; 28.118,53.416 28.092,53.442 ; D7.1@29.597,34.55 29.597,38.354 28.067,39.884 28.067,42.059 29.721,43.713 D6.1@29.721,43.739 29.874,43.891 29.874,48.11 28.092,49.891 28.092,53.442 ; 14.247,95.8 14.122,95.675 14.122,67.412 28.092,53.442
  Bottom Layer w1: F1.1@19.964,117.068 F1.1@20.176,116.856
  Bottom Layer w2.5: 1.7,26.289 1.549,26.138 1.549,13.148 3.674,11.023 F3.1@4.445,11.023 ; 5.969,31 6.069,31.1 7.001,31.1 7.184,31.283 ; 8.738,40.935 D2.2@13.416,40.935 ; 10.06,31.283 9.423,31.919 13.207,31.919 D4.2@13.843,31.283 ; F1.1@19.964,117.068 19.964,115.18 v3(21.488,113.656) 23.444,111.7 v2@23.444,110.414
  Bottom Layer w3: 1.7,26.289 1.7,26.44 5.969,30.709 5.969,31 5.969,32.08 motor.1@4.445,33.604 ; 7.184,31.283 8.738,31.283 ; 10.06,31.283 8.738,31.283 ; F2.2@14.122,80.518 14.122,80.416 14.122,51.374 D3.2@13.589,50.841 13.289,50.541 11.38,50.541 8.738,47.899 8.738,40.935 8.738,31.283
  other v2: 13.97,67.894 14.046,71.298 14.097,74.092 14.046,77.064 23.444,110.211 22.936,112.116
Aref: C4.1 L1.2 U1.62 | length 20.3
  Top Layer w0.5: v1(69.672,80.721) 69.19,80.239 69.19,71.971 71.044,70.117 U1.62@71.044,67.945
  Bottom Layer w0.5: v1(69.672,80.721) 69.73,80.779 69.73,81.72 70.792,82.783 C4.1@70.792,83.033 70.986,83.033 L1.2@74.563,83.033
BLA: GLCD1.19 R24.1 | length 22.6
  Bottom Layer w1: R24.1@117.678,65.757 117.703,65.782 118.028,65.782 122.403,70.156 GLCD1.19@122.403,86.233
BLB: GLCD1.20 R25.1 | length 22.1
  Bottom Layer w1: R25.1@121.564,65.68 121.889,65.68 124.943,68.734 GLCD1.20@124.943,86.233
Buzzer: R7.2 U1.60 | length 43.2
  Top Layer w0.5: v1(70.841,73.457) 70.874,73.457 72.644,71.687 U1.60@72.644,67.945
  Bottom Layer w0.5: R7.2@35.002,70.917 68.303,70.917 70.841,73.455 v1(70.841,73.457)
CS: SD.1 U1.10 | length 43.6
  Top Layer w0.5: SD.1@44.171,30.328 44.171,33.142 54.483,43.454 54.483,54.356 59.258,59.131 U1.10@67.818,59.131
CS1: GLCD1.16 U1.55 | length 60.5
  Top Layer w0.5: U1.55@76.632,67.945 76.636,67.949 76.636,68.586 76.741,68.691 76.741,72.346 80.645,76.251 81.103,76.251 81.117,76.265 93.207,76.265 100.559,83.617 104.089,83.617 110.495,90.023 123.653,90.023 GLCD1.16@124.943,91.313
CS2: GLCD1.15 U1.56 | length 59.3
  Top Layer w0.5: U1.56@75.844,67.945 75.848,67.949 75.848,68.586 75.928,68.665 75.928,73.185 79.858,77.114 92.761,77.114 100.178,84.531 103.657,84.531 110.439,91.313 GLCD1.15@122.403,91.313
D/I: GLCD1.4 U1.59 | length 71.3
  Top Layer w0.5: U1.59@73.431,67.945 73.431,74.193 78.74,79.502 92.179,79.502 99.308,86.631 100.55,86.631 119.222,105.303 123.921,105.303 124.943,106.324 GLCD1.4@124.943,106.553
DB0: GLCD1.7 U1.51 | length 59.2
  Top Layer w0.5: U1.51@79.832,67.945 79.836,67.949 79.836,69.905 81.686,71.755 v1(87.579,71.755)
  Bottom Layer w0.5: v1(87.579,71.755) 87.579,74.397 114.656,101.473 GLCD1.7@122.403,101.473
DB1: GLCD1.8 U1.50 | length 60.8
  Top Layer w0.5: U1.50@80.645,67.945 80.649,67.949 80.649,69.6 81.609,70.56 87.883,70.56 v1(88.9,71.577)
  Bottom Layer w0.5: v1(88.9,71.577) 88.9,74.447 114.676,100.223 123.693,100.223 GLCD1.8@124.943,101.473
DB2: GLCD1.9 U1.49 | length 56.9
  Top Layer w0.5: U1.49@81.432,67.945 88.786,67.945 90.297,69.456 v1(90.297,71.603)
  Bottom Layer w0.5: v1(90.297,71.603) 90.297,74.752 114.478,98.933 GLCD1.9@122.403,98.933
DB3: GLCD1.10 U1.48 | length 59.3
  Top Layer w0.5: U1.48@83.058,66.319 84.026,66.319 89.129,66.319 91.618,68.809 v1(91.618,71.603)
  Bottom Layer w0.5: v1(91.618,71.603) 91.618,74.701 114.559,97.643 124.455,97.643 124.748,97.936 124.748,98.738 GLCD1.10@124.943,98.933
DB4: GLCD1.11 U1.47 | length 55.7
  Top Layer w0.5: U1.47@83.058,65.532 83.062,65.536 89.844,65.536 92.913,68.605 v1(92.913,71.653)
  Bottom Layer w0.5: v1(92.913,71.653) 92.913,74.651 114.555,96.292 122.302,96.292 GLCD1.11@122.403,96.393
DB5: GLCD1.12 U1.46 | length 58.8
  Top Layer w0.5: U1.46@83.058,64.719 90.78,64.719 94.336,68.275 v1(94.336,71.628)
  Bottom Layer w0.5: v1(94.336,71.628) 94.336,74.828 114.65,95.143 123.693,95.143 GLCD1.12@124.943,96.393
DB6: GLCD1.13 U1.45 | length 55.4
  Top Layer w0.5: U1.45@83.058,63.932 91.289,63.932 95.733,68.375 v1(95.733,71.704)
  Bottom Layer w0.5: v1(95.733,71.704) 95.733,74.676 114.91,93.853 GLCD1.13@122.403,93.853
DB7: GLCD1.14 U1.44 | length 58.3
  Top Layer w0.5: U1.44@83.058,63.119 91.907,63.119 96.926,68.139 v1(96.926,71.679)
  Bottom Layer w0.5: v1(96.926,71.679) 96.926,74.346 115.184,92.603 123.693,92.603 GLCD1.14@124.943,93.853
E: GLCD1.6 U1.57 | length 68.1
  Top Layer w0.5: U1.57@75.032,67.945 75.036,67.949 75.036,68.586 75.14,68.691 75.14,73.566 79.603,78.029 92.685,78.029 99.888,85.231 103.138,85.231 120.63,102.723 123.653,102.723 GLCD1.6@124.943,104.013